# Altium PCB PCB1.PcbDoc
Units mm, origin at the board's own origin, x right, y up, seen from the top; angles counter-clockwise.
Board outline 52.5 x 47.5 mm, 2 copper layers (Top Layer, Bottom Layer); 22 components, 44 nets, 139 pads, 0 vias.
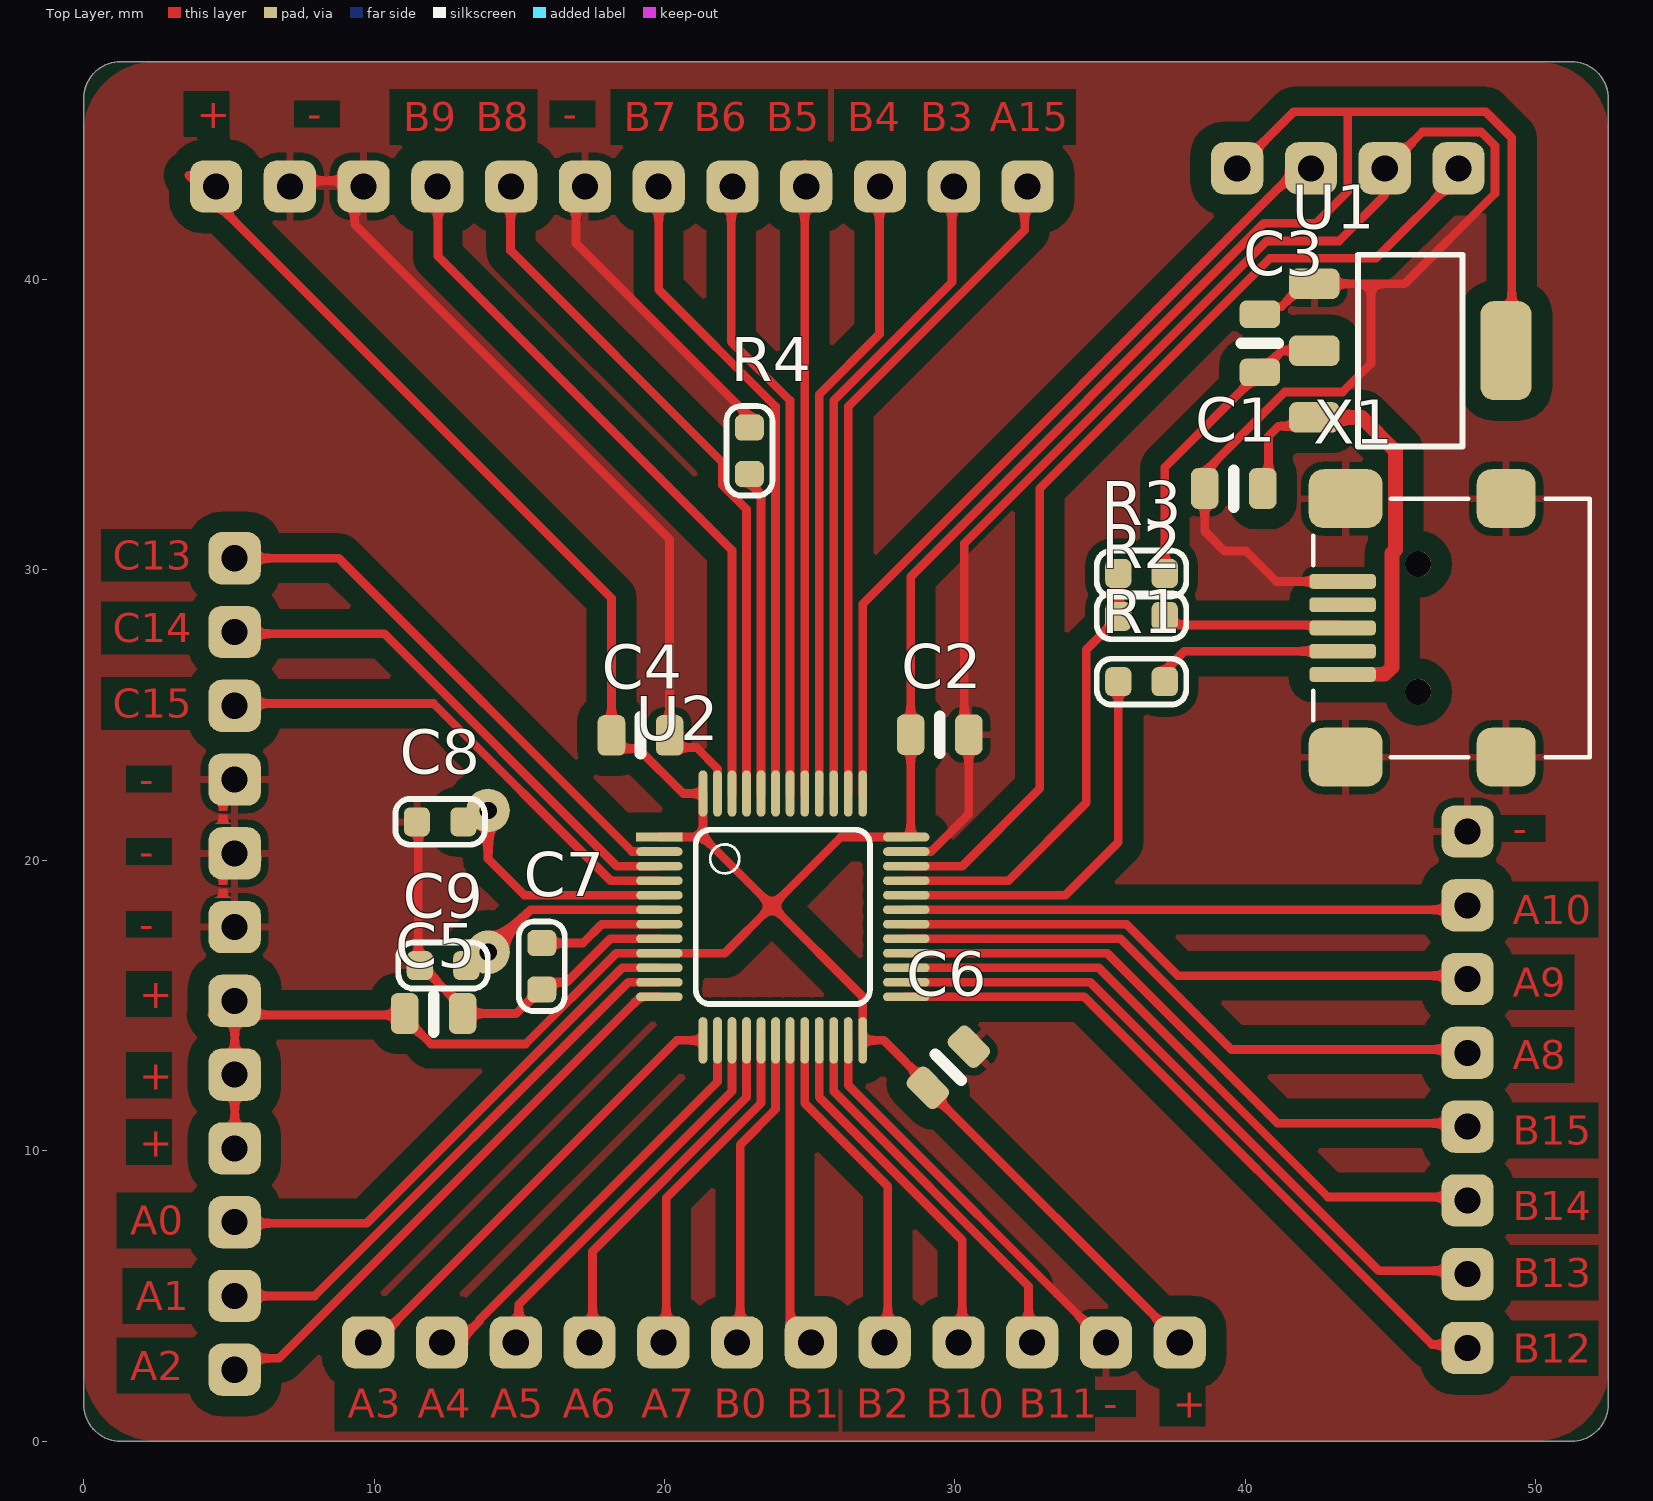
[diagram p0: Top Layer view]
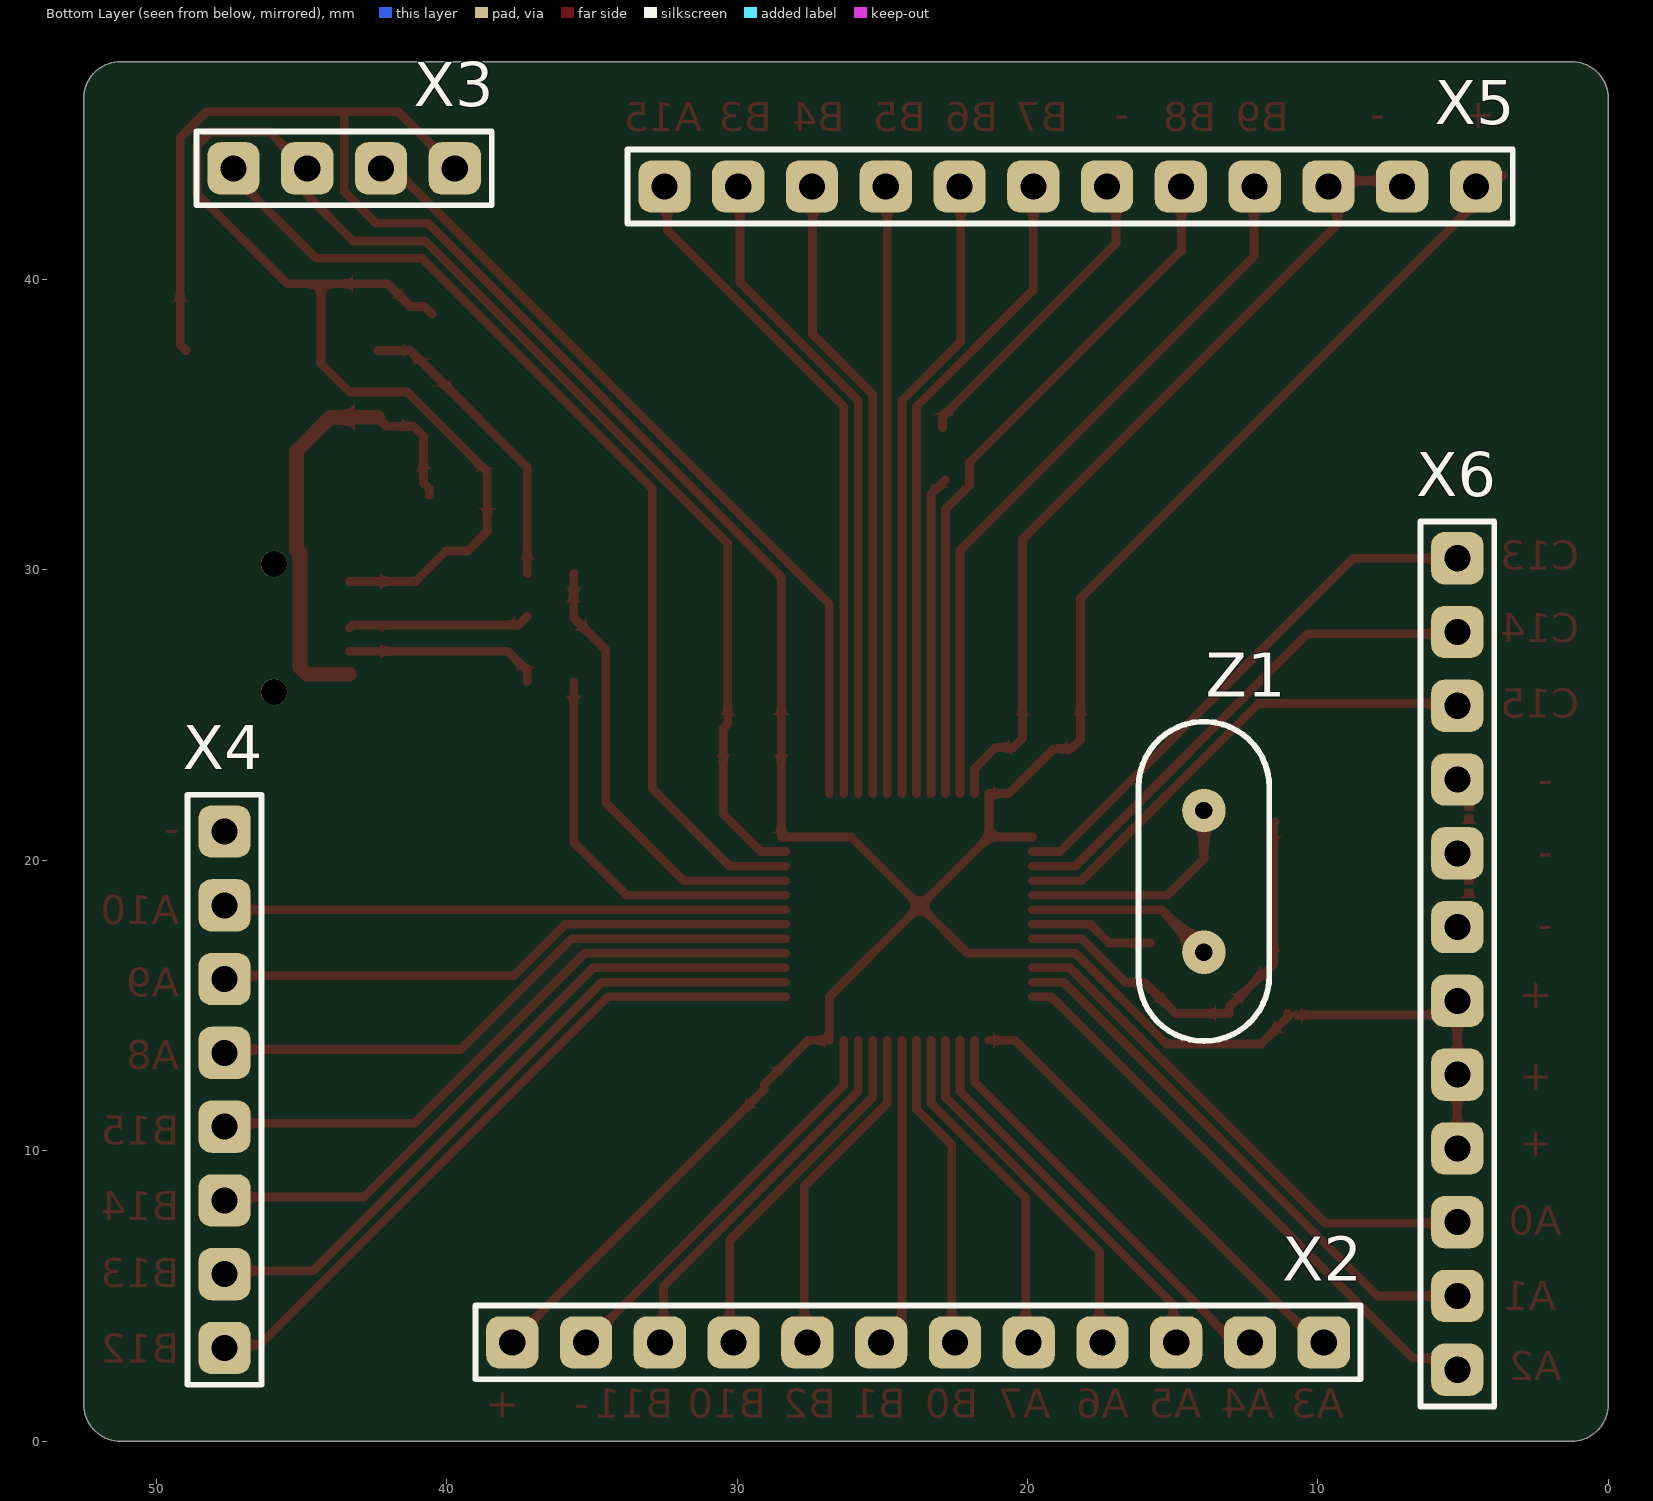
[diagram p1: Bottom Layer view, seen from below]

## Layer stack, top to bottom
Top Solder: solder mask 0.0102, Solder Resist, Dk 3.5
Top Layer: signal copper 0.0356
Dielectric 1: dielectric 0.32, FR-4, Dk 4.8
Bottom Layer: signal copper 0.0356
Bottom Solder: solder mask 0.0102, Solder Resist, Dk 3.5

## Board outline
0,1.27 0,46.23 cw(c1.27,46.23) 1.27,47.5 51.23,47.5 cw(c51.23,46.23) 52.5,46.23 52.5,1.27 cw(c51.23,1.27) 51.23,0 1.27,0 cw(c1.27,1.27)

## Design rules (kind name [scope] priority, off if disabled: settings)
Clearance [All] p1: gap=0.2 ignorepadtopadclearanceinfootprint=FALSE except(0.7: Arc-Poly Track-Poly SMDPad-Poly THPad-Poly Via-Poly Fill-Poly Poly-Poly)
PolygonConnect [All] p1: connectstyle=Relief reliefconductorwidth=0.254 reliefentries=4 polygonreliefangle="90 Angle" airgapwidth=0.254
RoutingVias [All] p1: holewidth=0.711 width=1.27 viastyle="Through Hole" minholewidth=0.711 minwidth=1.27 maxholewidth=0.711 maxwidth=1.27
SolderMaskExpansion [All] p1: expansion=0.102
Width [All] p1: maxlimit=1 minlimit=0.3 preferedwidth=0.3
30 further rules are at their usual default settings.

## Components (designator, comment, footprint, x,y, rotation, side; value= is the part's Value field where it differs from the comment)
C1 "1uF" CAP_0805 39.6,32.8 r0 top
C2 "1uF" CAP_0805 29.475,24.325 r180 top
C3 "1uF" CAP_0805 40.5,37.8 r270 top
C4 "1uF" CAP_0805 19.175,24.3 r180 top
C5 "1uF" CAP_0805 12.05,14.725 r180 top
C6 "1uF" CAP_0805 29.775,12.875 r225 top
C7 "CAP0603" CAP_0603 15.775,16.35 r270 top
C8 "CAP0603" CAP_0603 12.275,21.325 r180 top
C9 "CAP0603" CAP_0603 12.375,16.375 r180 top
R1 "22" RES_0603 36.425,26.15 r0 top
R2 "22" RES_0603 36.425,28.4 r0 top
R3 "1.5k" RES_0603 36.425,29.875 r180 top
R4 "50k" RES_0603 22.925,34.1 r90 top
U1 "LM1117" SOT223 45.675,37.55 r270 top
U2 "STM32F103C8T6" LQFP48 24.075,18.05 r0 top
X1 "Model" USB_MINI-B 43.35,28 r270 top
X2 "Model" PLS-12-3D 9.8,3.4 r0 bottom
X3 "SWD" PLS-4-3D 39.72,43.825 r0 bottom
X4 "Model" PLS-8-3D 47.649,3.21 r90 bottom
X5 "Model" PLS-12-3D 32.5,43.2 r180 bottom
X6 "Model" PLS-12-3D 5.2,30.4 r270 bottom
Z1 "HC-49S" HC49S 13.925,19.275 r270 bottom

## Footprints (in the part's own frame and the unit in brackets; to place one, negate y for a bottom-side part, rotate by r counter-clockwise, add the part's x,y. Pads: shape width x height; smd on the part's side, far side on the other; paste and mask are expansions set on the pad)
CAP_0603 [mm] "Chip Resistor, EIA 0603, Metric 1608, Body 1.6x0.8mm, IPC Medium Density"
  rrect50% 0.9x1 smd: 1(-0.8,0) 2(0.8,0)
  silkscreen extent -1.54,-0.79 1.54,0.79, body extent -0.88,-0.48 0.87,0.48, height 0.85
CAP_0805 [mm] "Chip Resistor, EIA 0805, Metric 2012, Body 2.0x1.2mm, IPC Medium Density"
  rrect50% 0.95x1.4 smd: 1(-1,0) 2(1,0)
  silkscreen extent 0,-0.64 0,0.64, body extent -1.05,-0.67 1.05,0.68, height 0.9
HC49S [mm]
  round 1.5 hole 0.6: 1(-2.44,0) 2(2.44,0)
  silkscreen extent -5.5,-2.25 5.5,2.25, body extent -5.5,-2.25 5.5,2.25, height 3.7
LQFP48 [mm] "QFP, 0.50mm Pitch, Square, 12 pin X 12 Pin, 7.00mm X 7.00mm X 1.20mm Body, IPC Medium Density"
  rect 1.6x0.3 smd: 1(-4.25,2.75)
  rrect100% 1.6x0.3 smd: 2(-4.25,2.25) 3(-4.25,1.75) 4(-4.25,1.25) 5(-4.25,0.75) 6(-4.25,0.25) 7(-4.25,-0.25) 8(-4.25,-0.75) 9(-4.25,-1.25) 10(-4.25,-1.75) 11(-4.25,-2.25) 12(-4.25,-2.75) 25(4.25,-2.75) 26(4.25,-2.25) 27(4.25,-1.75) 28(4.25,-1.25) 29(4.25,-0.75) 30(4.25,-0.25) 31(4.25,0.25) 32(4.25,0.75) 33(4.25,1.25) 34(4.25,1.75) 35(4.25,2.25) 36(4.25,2.75)
  rrect100% 0.3x1.6 smd: 13(-2.75,-4.25) 14(-2.25,-4.25) 15(-1.75,-4.25) 16(-1.25,-4.25) 17(-0.75,-4.25) 18(-0.25,-4.25) 19(0.25,-4.25) 20(0.75,-4.25) 21(1.25,-4.25) 22(1.75,-4.25) 23(2.25,-4.25) 24(2.75,-4.25) 37(2.75,4.25) 38(2.25,4.25) 39(1.75,4.25) 40(1.25,4.25) 41(0.75,4.25) 42(0.25,4.25) 43(-0.25,4.25) 44(-0.75,4.25) 45(-1.25,4.25) 46(-1.75,4.25) 47(-2.25,4.25) 48(-2.75,4.25)
  silkscreen extent -3,-3 3,3, body extent -4.6,-4.6 4.6,4.6, height 1.2
PLS-4-3D [mm] "Connector; Header; 4 Position"
  rrect50% 1.8x1.8 hole 0.9: 1(0,0) 2(2.54,0) 3(5.08,0) 4(7.62,0)
  silkscreen extent -1.27,-1.27 8.89,1.27, body extent -1.27,-1.27 8.89,1.27, height 8.44
PLS-8-3D [mm] "Connector; Header; 8 Position"
  rrect50% 1.8x1.8 hole 0.9: 1(0,0) 2(2.54,0) 3(5.08,0) 4(7.62,0) 5(10.16,0) 6(12.7,0) 7(15.24,0) 8(17.78,0)
  silkscreen extent -1.27,-1.27 19.05,1.27, body extent -1.27,-1.27 19.05,1.27, height 8.44
PLS-12-3D [mm] "Connector; Header; 12 Position"
  rrect50% 1.8x1.8 hole 0.9: 1(0,0) 2(2.54,0) 3(5.08,0) 4(7.62,0) 5(10.16,0) 6(12.7,0) 7(15.24,0) 8(17.78,0) 9(20.32,0) 10(22.86,0) 11(25.4,0) 12(27.94,0)
  silkscreen extent -1.27,-1.27 29.21,1.27, body extent -1.27,-1.27 29.21,1.27, height 8.44
RES_0603 [mm] "Chip Resistor, EIA 0603, Metric 1608, Body 1.6x0.8mm, IPC Medium Density"
  rrect50% 0.9x1 smd: 1(-0.8,0) 2(0.8,0)
  silkscreen extent -1.54,-0.79 1.54,0.79, body extent -0.87,-0.47 0.88,0.48, height 0.55
SOT223 [mm] "SOT-223/SC-73; 4 Leads; Body 6.7 x 7.3 mm, inc. leads (LxW max)"
  rrect50% 1.05x1.75 smd: 1(-2.3,-3.3) 2(0,-3.3) 3(2.3,-3.3)
  rrect50% 3.4x1.75 smd: 2(0,3.3)
  silkscreen extent -3.3,-1.8 3.3,1.8, body extent -3.25,-3.5 3.25,3.5, height 1.64
USB_MINI-B [mil]
  rrect50% 80x80 smd: 0(-175.2,221.69) 0(175.2,221.69)
  rrect50% 80x100 smd: 0(-175.2,3.94) 0(175.2,3.94)
  round 35.43 hole 35.43 unplated: 0(-86.61,102.36) 0(86.61,102.36)
  rrect50% 20x90 smd: 1(62.99,0) 2(31.5,0) 3(0,0) 4(-31.5,0) 5(-62.99,0)
  silkscreen extent -175,-40 175,335, body extent -211,-28 211,335, height 156

## Part data
C1 C2 C3 C4 C5 C6: library part Capacitor, "Конденсатор", ValueBOM="0805 1uF", ValueSCH=1uF
R1 R2: library part Resisitor, "Резистор", ValueBOM="0805 10k 0.125", MarkPCB=103, ValueSCH=22
R3 R4: library part Resisitor, "Резистор", ValueBOM="0805 47 0.125", MarkPCB=103
  R3: ValueSCH=1.5k
  R4: ValueSCH=50k
U1: "Стабилизатор LDO", HelpURL=C:\Datasheets\.pdf, MarkPCB=xx, ValueBOM=LM1117, ValueSCH=LM1117
U2: "Микроконтроллер", HelpURL=C:\Datasheets\.pdf, MarkPCB=STM32F103C8T6, ValueBOM=STM32F103C8T6, ValueSCH=STM32F103C8T6
X1: library part "miniUSB connector", "коннектор USB", Name=USB, Net1=VCC, Net2=D-, Net3=D+, Net4=ID, Net5=GND, Net6=SHIELD, ValueSCH=Model
X2 X5 X6: library part "Connector 12", NET?=HDR1, ValueSCH=Model
  X2: Net1=PA3, Net2=PA4, Net3=PA5, Net4=PA6, Net5=PA7, Net6=PB0, Net7=PB1, Net8=PB2, Net9=PB10, Net10=PB11, Net11=GND, Net12=3V3
  X5: Net1=PA15, Net2=PB3, Net3=PB4, Net4=PB5, Net5=PB6, Net6=PB7, Net7=GND, Net8=PB8, Net9=PB9, Net10=GND, Net11=GND, Net12=3V3
  X6: Net1=PC13, Net2=PC14, Net3=PC15, Net4=GND, Net5=GND, Net6=GND, Net7=3V3, Net8=3V3, Net9=3V3, Net10=PA0, Net11=PA1, Net12=PA2
X3: library part "Connector 4", Name=SWD, Net1=3V3, Net2=SWCLK, Net3=GND, Net4=SWDIO, ValueSCH=SWD
X4: library part "Connector 8", Net1=PB12, Net2=PB13, Net3=PB14, Net4=PB15, Net5=PA8, Net6=PA9, Net7=PA10, Net8=GND, ValueSCH=Model
C7: BOM=100n
C8 C9: BOM=18p
Z1: BOM="KX-3H 8MHz"

## Nets (pads, with @x,y where several pads share a name; then routed paths per layer and width w, separated by ;. In a path a pad name is that pad's centre, name@x,y a point inside that pad or via, vN(x,y) a via of type N, cw(c..) or ccw(c..) an arc to the next point about the centre after c; other vN are vias at no path point)
3V3: C2.2 C3.2 C4.2 C5.2 C6.2 R3.1 U1.2 U2.1 U2.9 U2.24 U2.36 U2.48 X2.12 X3.1 X5.12 X6.7 X6.8 X6.9 | length 149.6
  Top Layer w0.3: 3.615,43.585 4.094,43.106 18.175,29.025 C4.2 18.175,24.162 18.493,23.844 19.1,23.844 20.644,22.3 U2.48 21.325,20.8 ; X6.7@4.415,14.675 5.2,14.675 C5.2@10.75,14.675 ; X6.9 X6.8 5.2,14.46 X6.7@5.215,14.475 ; C5.2 11.05,14.587 11.962,13.675 15.213,13.675 18.338,16.8 U2.9 22.075,16.8 23.7,18.425 ; U2.1 21.325,20.8 ; R3.1 37.225,33.525 C3.2 41.25,37.55 U1.2@42.375,37.55 ; X2.12@37.845,3.275 37.845,3.333 29.068,12.11 C6.2 29.068,12.282 27.55,13.8 U2.24 26.825,15.3 23.7,18.425 ; X3.1 41.67,45.775 43.525,45.775 48.275,45.775 49.175,44.875 49.175,37.75 U1.2@48.975,37.55 ; 43.525,45.77 43.525,43.025 42.43,41.93 40.638,41.93 28.475,29.768 C2.2 28.475,20.8 U2.36 26.075,20.8 23.7,18.425 ; 21.325,20.8 23.7,18.425
5V: C1.2 U1.3 X1.1 | length 16.5
  Top Layer w0.3: C1.2@40.6,32.575 C1.2 40.8,33 40.8,34.6 41.144,34.944 42.069,34.944 U1.3
  Top Layer w0.5: U1.3 44.001,35.25 45.17,34.081 45.17,30.693 45.05,30.573 45.05,26.65 44.8,26.4 X1.1
BOOT0: R4.1 U2.44 | length 11
  Top Layer w0.3: R4.1@22.825,33.1 23.325,32.6 U2.44
GND: C1.1 C2.1 C3.1 C4.1 C5.1 C6.1 C7.2 C8.2 C9.2 R4.2 U1.1 U2.8 U2.23 U2.35 U2.47 X1.0@43.45,23.55 X1.0@43.45,32.45 X1.0@48.981,23.55 X1.0@48.981,32.45 X1.5 X2.11 X3.3 X4.8 X5.7 X5.10 X5.11 X6.4 X6.5 X6.6 | length 135.4
  Top Layer w0.3: X6.5@6,20.04 X6.5@6,20.11 ; X5.11@6.795,43.4 9.335,43.4 9.335,41.89 20.175,31.05 C4.1 20.175,24.2 20.493,23.882 21.1,23.882 21.825,23.157 U2.47 ; C8.2 11.525,21.275 11.525,16.425 C9.2 11.575,16.366 11.869,16.071 11.929,16.071 13.05,14.95 C5.1 14.9,14.725 15.979,15.804 16.635,15.804 18.131,17.3 U2.8 ; X5.7@16.955,43.268 16.955,41.245 22.925,35.275 R4.2 ; U2.23 26.325,12.255 X2.11@35.305,3.275 ; U2.35 29.182,20.3 30.475,21.593 C2.1 30.475,24.55 30.325,24.7 30.325,30.911 40.739,41.325 43.225,41.325 44.8,42.9 X3.3 44.85,43.825 46.1,45.075 48.121,45.075 48.597,44.599 48.597,42.958 45.489,39.85 44.325,39.85 ; C3.1 40.771,39.071 41.246,39.071 42.025,39.85 U1.1 44.325,39.85 ; X1.5 41.075,29.6 40.025,30.65 39.275,30.65 38.6,31.325 C1.1 38.6,33.369 41.356,36.125 43.344,36.125 44.325,37.106 44.325,39.85
NetR1_2: R1.2 X1.2 | length 6.8
  Top Layer w0.3: R1.2 37.225,26.525 37.9,27.2 X1.2
NetR2_2: R2.2 X1.3 | length 6.3
  Top Layer w0.3: R2.2 37.225,28.398 37.519,28.104 43.246,28.104 X1.3
NRST: C7.1 U2.7 | length 4.3
  Top Layer w0.3: C7.1 17.195,17.15 17.845,17.8 U2.7
PA0: U2.10 X6.10 | length 18.4
  Top Layer w0.3: X6.10@5.2,7.93 5.63,7.5 9.745,7.5 18.545,16.3 U2.10
PA1: U2.11 X6.11 | length 19.3
  Top Layer w0.3: X6.11@5.2,5.39 5.59,5 7.952,5 18.752,15.8 U2.11
PA2: U2.12 X6.12 | length 19.8
  Top Layer w0.3: X6.12@5.2,2.85 6.725,2.85 19.175,15.3 U2.12
PA3: U2.13 X2.1 | length 15.8
  Top Layer w0.3: X2.1@9.905,3.275 20.43,13.8 U2.13
PA4: U2.14 X2.2 | length 14.6
  Top Layer w0.3: X2.2@12.445,3.275 12.775,3.275 13.63,4.13 13.63,4.181 21.825,12.376 U2.14
PA5: U2.15 X2.3 | length 13.6
  Top Layer w0.3: X2.3@14.985,3.275 14.985,4.705 22.325,12.045 U2.15
PA6: U2.16 X2.4 | length 12.7
  Top Layer w0.3: X2.4@17.525,3.275 17.525,6.538 22.825,11.838 U2.16
PA7: U2.17 X2.5 | length 11.9
  Top Layer w0.3: X2.5@20.065,3.275 20.065,8.371 23.325,11.631 U2.17
PA8: U2.29 X4.5 | length 21
  Top Layer w0.3: U2.29 35.7,17.3 39.515,13.485 X4.5@47.7,13.485
PA9: U2.30 X4.6 | length 20.5
  Top Layer w0.3: U2.30 35.907,17.8 37.682,16.025 X4.6@48.1,16.025
PA10: U2.31 X4.7 | length 19.4
  Top Layer w0.3: U2.31 47.649,18.3 X4.7@47.7,18.3
PA15: U2.38 X5.1 | length 23.9
  Top Layer w0.3: U2.38 26.325,35.625 32.4,41.7 32.4,43 X5.1@32.91,43.51
PB0: U2.18 X2.6 | length 11
  Top Layer w0.3: X2.6@22.605,3.275 22.605,10.204 23.825,11.424 U2.18
PB1: U2.19 X2.7 | length 10.9
  Top Layer w0.3: U2.19 24.325,4.152 25.145,3.332 X2.7@25.145,3.275
PB2: U2.20 X2.8 | length 11.7
  Top Layer w0.3: U2.20 24.825,11.634 27.685,8.774 X2.8@27.685,3.275
PB3: U2.39 X5.2 | length 23.2
  Top Layer w0.3: U2.39 25.825,35.832 29.9,39.907 29.9,43.5 X5.2@30.14,43.74
PB4: U2.40 X5.3 | length 21.7
  Top Layer w0.3: U2.40 25.325,36.039 27.4,38.114 27.4,42.755 X5.3@27.115,43.04
PB5: U2.41 X5.4 | length 21.7
  Top Layer w0.3: U2.41 X5.4@24.825,43.975
PB6: U2.42 X5.5 | length 21.9
  Top Layer w0.3: X5.5@22.035,43.268 22.3,43.002 22.3,37.857 24.325,35.832 U2.42
PB7: U2.43 X5.6 | length 22.8
  Top Layer w0.3: X5.6@19.495,43.268 19.8,42.962 19.8,39.65 23.825,35.625 U2.43
PB8: U2.45 X5.8 | length 24.7
  Top Layer w0.3: X5.8@14.415,43.5 14.7,43.215 14.7,41 22,33.7 22,32.912 22.825,32.087 U2.45
PB9: U2.46 X5.9 | length 25.3
  Top Layer w0.3: X5.9@11.875,43.268 12.2,42.942 12.2,40.8 22.325,30.675 U2.46
PB10: U2.21 X2.9 | length 13
  Top Layer w0.3: U2.21 25.325,11.841 30.25,6.916 30.25,3.6 29.925,3.275 X2.9@30.225,3.275
PB11: U2.22 X2.10 | length 13.4
  Top Layer w0.3: U2.22 25.825,12.048 32.535,5.338 32.535,3.505 X2.10@32.765,3.275
PB12: U2.25 X4.1 | length 24.3
  Top Layer w0.3: U2.25 34.45,15.3 46.425,3.325 X4.1@47.7,3.325
PB13: U2.26 X4.2 | length 23.5
  Top Layer w0.3: U2.26 34.657,15.8 44.592,5.865 X4.2@47.7,5.865
PB14: U2.27 X4.3 | length 22.6
  Top Layer w0.3: U2.27 34.95,16.3 42.845,8.405 X4.3@47.7,8.405
PB15: U2.28 X4.4 | length 21.8
  Top Layer w0.3: U2.28 35.25,16.8 41.105,10.945 X4.4@47.7,10.945
PC13: U2.2 X6.1 | length 19.3
  Top Layer w0.3: X6.1@4.762,30.59 X6.1@4.8,30.59 ; X6.1@5.1,30.2 5.1,30.5 X6.1 8.78,30.4 18.88,20.3 U2.2
PC14: U2.3 X6.2 | length 18.2
  Top Layer w0.3: X6.2@5.1,28.25 5.55,27.8 10.357,27.8 18.357,19.8 U2.3
PC15: U2.4 X6.3 | length 17.4
  Top Layer w0.3: X6.3@5.1,25.71 5.41,25.4 12.05,25.4 18.15,19.3 U2.4
SWCLK: U2.37 X3.2 | length 28.2
  Top Layer w0.3: U2.37 26.825,28.825 41.825,43.825 X3.2
SWDIO: U2.34 X3.4 | length 35.2
  Top Layer w0.3: U2.34 30.25,19.8 32.925,22.475 32.925,32.804 40.846,40.725 44.5,40.725 47.34,43.565 X3.4
USBDM: R1.1 U2.32 | length 13.6
  Top Layer w0.3: U2.32 33.8,18.8 35.625,20.625 R1.1
USBDP: R2.1 R3.2 U2.33 | length 15.7
  Top Layer w0.3: U2.33 31.843,19.3 34.521,21.979 34.521,27.246 35.625,28.35 R2.1 R3.2
XTAL0: C8.1 U2.5 Z1.1 | length 8.1
  Top Layer w0.3: Z1.1 13.925,20.058 15.183,18.8 U2.5
XTAL1: C9.1 U2.6 Z1.2 | length 6.5
  Top Layer w0.3: Z1.2 15.39,18.3 U2.6
pads on no net: X1.0@45.95,25.8 X1.0@45.95,30.2 X1.4

## Polygon pours and split planes (outlines as drawn)
GND on Top Layer (solid, pour order 12): 50,47.5 cw(c50,45) 52.5,45 52.5,2.54 cw(c49.96,2.54) 49.96,0 2.54,0 cw(c2.54,2.54) 0,2.54 0,45 cw(c2.5,45) 2.5,47.5
no net on Top Layer (solid, pour order 10): 2.5,47.5
no net on Top Layer "Top Layer-No Net 1" (solid, pour order 0): 1.5,51.5

## Other copper
Top Layer:
  text "+" at 3.9,45.2 h1
  text "-" at 7.7,45.2 h1
  text "-" at 16.5,45.2 h1
  text "B9" at 11,45.1 h1
  text "B8" at 13.5,45.1 h1
  text "B7" at 18.6,45.1 h1
  text "B6" at 21,45.1 h1
  text "B5" at 23.5,45.1 h1
  text "B4" at 26.3,45.1 h1
  text "B3" at 28.8,45.1 h1
  text "A15" at 31.2,45.1 h1
  text "C13" at 1,30 h1
  text "C14" at 1,27.5 h1
  text "C15" at 1,24.9 h1
  text "-" at 1.916,22.3 h1
  text "-" at 49.2,20.6 h1
  text "-" at 1.916,19.8 h1
  text "A10" at 49.2,17.8 h1
  text "-" at 1.916,17.3 h1
  text "A9" at 49.2,15.3 h1
  text "+" at 1.916,14.9 h1
  text "A8" at 49.2,12.8 h1
  text "+" at 1.916,12.1 h1
  text "B15" at 49.2,10.2 h1
  text "+" at 1.916,9.8 h1
  text "B14" at 49.2,7.6 h1
  text "A0" at 1.6,7.1 h1
  text "B13" at 49.2,5.3 h1
  text "A1" at 1.8,4.5 h1
  text "B12" at 49.2,2.7 h1
  text "A2" at 1.6,2.1 h1
  text "A3" at 9.1,0.8 h1
  text "A4" at 11.5,0.8 h1
  text "A5" at 14,0.8 h1
  text "A6" at 16.5,0.8 h1
  text "A7" at 19.2,0.8 h1
  text "B0" at 21.7,0.8 h1
  text "B1" at 24.2,0.8 h1
  text "B2" at 26.6,0.8 h1
  text "B10" at 29,0.8 h1
  text "B11" at 32.2,0.8 h1
  text "-" at 35.1,0.8 h1
  text "+" at 37.5,0.8 h1

## Silkscreen, mask and mechanical layers (free items; w line width, h text height)
Mechanical 1:
  the board outline again, w0.254